# EAGLE board ece411-t10-plant-final-layout (EAGLE 9.2.1)
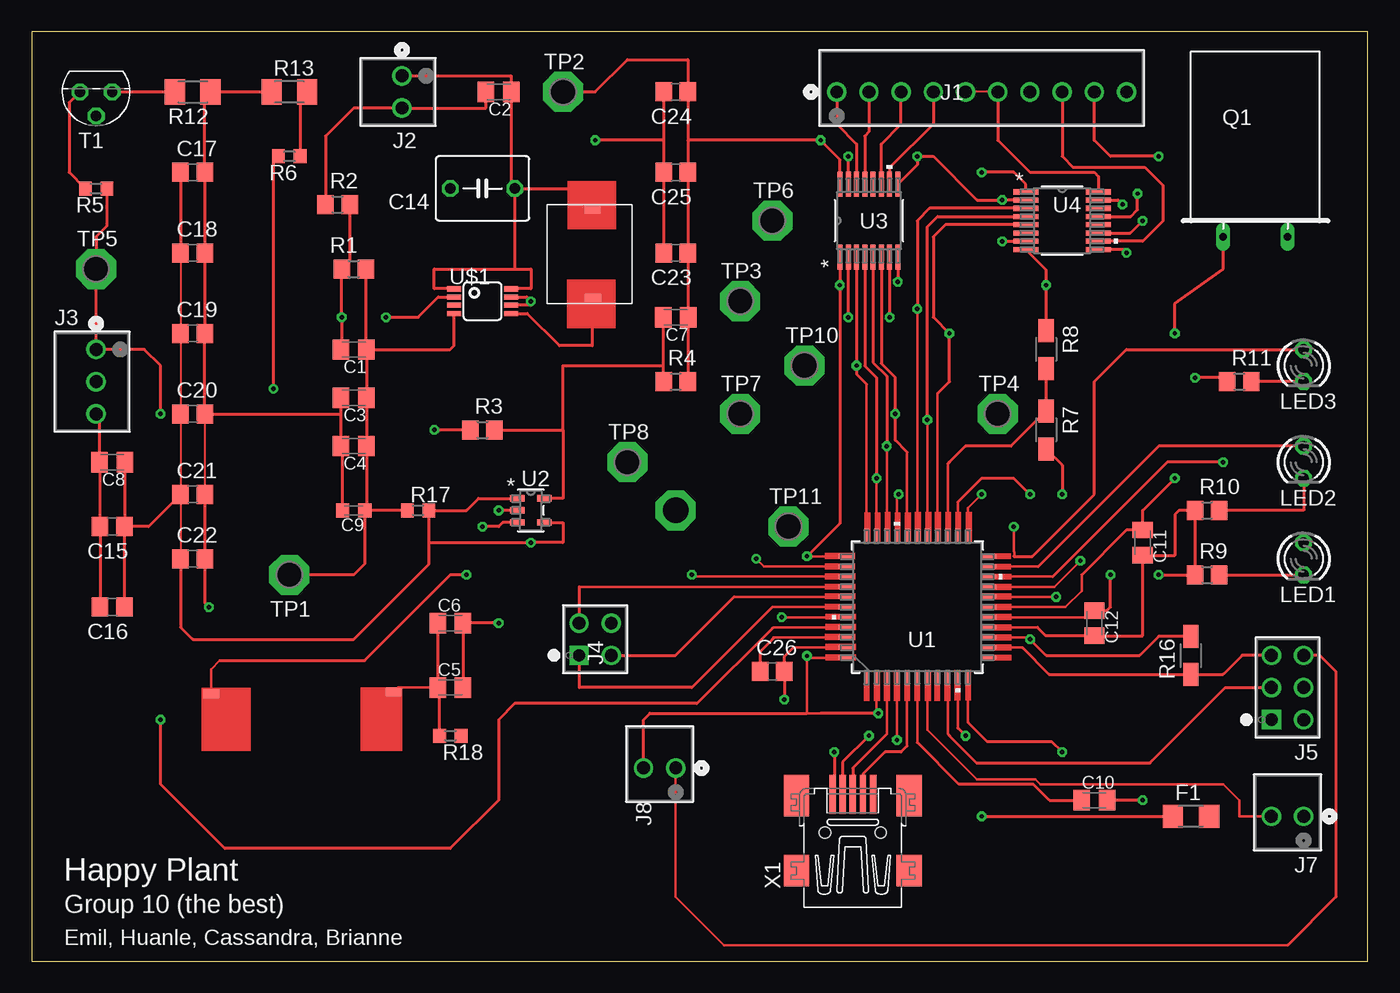
[diagram p0: board, top side]
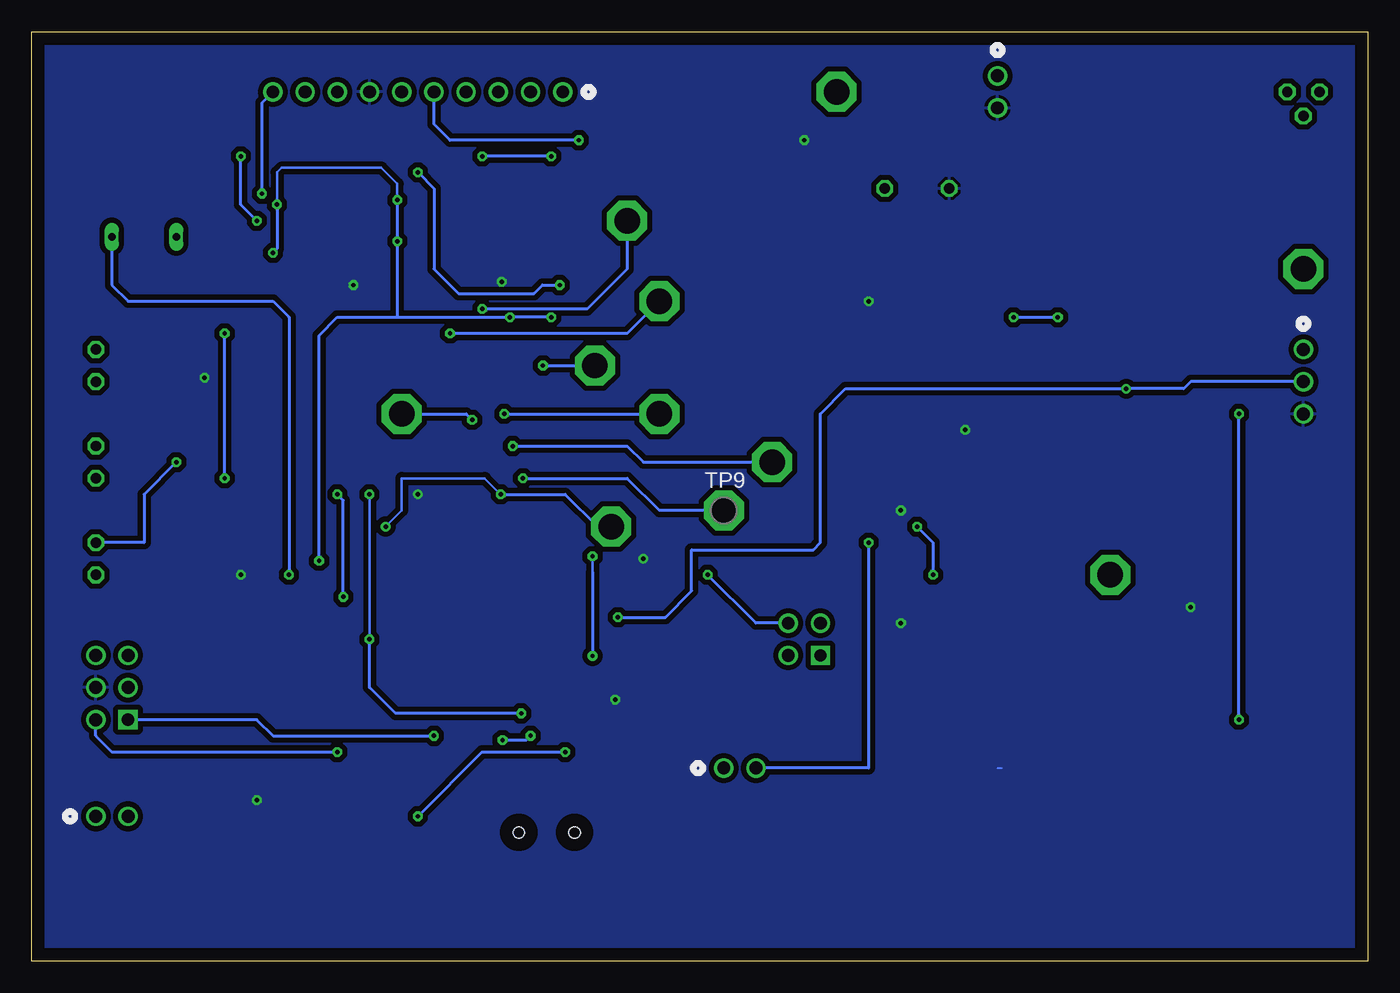
[diagram p1: board, bottom side, seen from below]

Size 105.39 x 73.33 mm. Coordinates in mm from the lower left corner, seen from the top.
Outline: 0,0 105.39,0 105.39,73.33 0,73.33 0,0
Copper layers (1*16): Top 0.035mm / dielectric 1.5mm / Bottom 0.035mm
Design rules "default": minimum track width 6mil, minimum drill 0.35mm, track to track 6mil, track to pad 6mil, pad to pad 6mil, via to via 6mil, smd to smd 6mil, copper to edge 40mil, drill to drill 6mil, minimum pad ring 10mil, minimum via ring 8mil, stop-mask expansion 4mil, vias tented up to drill 0mil, thermal gap 10mil

## Footprints (pad centres in the part's own frame; a part is rotated, then mirrored left to right if it is on the bottom)
C0805K = smd 1.3 x 1.6: 1 -1,0; 2 1,0
C0603K = smd 1.05 x 1.08: 1 -0.875,0; 2 0.875,0
C050-050X075 = drill 0.813 octagon: 1 -2.54,0; 2 2.54,0
C0805 = smd 1.3 x 1.5: 1 -0.95,0; 2 0.95,0
R1206 = smd 1.6 x 1.803: 1 -1.422,0; 2 1.422,0
1-640456-0 = drill 1.016 pad 1.524: 1 -22.86,0; 2 -20.32,0; 3 -17.78,0; 4 -15.24,0; 5 -12.7,0; 6 -10.16,0; 7 -7.62,0; 8 -5.08,0; 9 -2.54,0; 10 0,0
CONN2_640456-2 = drill 1.016 pad 1.524: 1 2.54,0; 2 0,0
CONN3_640456-3 = drill 1.016 pad 1.524: 1 5.08,0; 2 2.54,0; 3 0,0
67996-104HLF = drill 0.965 pad 1.524 square: 1 -2.54,2.54 | drill 1.016 pad 1.524: 2 -2.54,0; 3 0,2.54; 4 0,0
67996-406HLF = drill 0.965 pad 1.524 square: 1 -5.08,2.54 | drill 1.016 pad 1.524: 2 -5.08,0; 3 -2.54,2.54; 4 -2.54,0; 5 0,2.54; 6 0,0
MPLC0730L4R7 = smd 0.635 x 1.27: 1 0.4,3.6; 2 7.398,3.625
LED3MM = drill 0.813 octagon: A -1.27,0; K 1.27,0
Q = drill 0.61 long: 1 -2.54,-7.62; 2 2.54,-7.62
R0805 = smd 1.3 x 1.5: 1 -0.95,0; 2 0.95,0
R0603 = smd 1 x 1.1: 1 -0.85,0; 2 0.85,0
R1206W = smd 1.8 x 1.2: 1 -1.499,0; 2 1.499,0
M1206 = smd 1.6 x 2: 1 -1.4,0; 2 1.4,0
TO92 = drill 0.813 octagon: 1 1.27,0; 2 0,1.905; 3 -1.27,0
P1-20 = drill 2.007 pad 3.15 octagon: TP 0,0
44ML-L = smd 1.168 x 0.356: 1 -5.613,4; 2 -5.613,3.2; 3 -5.613,2.4; 4 -5.613,1.6; 5 -5.613,0.8; 6 -5.613,0; 7 -5.613,-0.8; 8 -5.613,-1.6; 9 -5.613,-2.4; 10 -5.613,-3.2; 11 -5.613,-4; 23 5.613,-4; 24 5.613,-3.2; 25 5.613,-2.4; 26 5.613,-1.6; 27 5.613,-0.8; 28 5.613,0; 29 5.613,0.8; 30 5.613,1.6; 31 5.613,2.4; 32 5.613,3.2; 33 5.613,4 | smd 0.356 x 1.168: 12 -4,-5.613; 13 -3.2,-5.613; 14 -2.4,-5.613; 15 -1.6,-5.613; 16 -0.8,-5.613; 17 0,-5.613; 18 0.8,-5.613; 19 1.6,-5.613; 20 2.4,-5.613; 21 3.2,-5.613; 22 4,-5.613; 34 4,5.613; 35 3.2,5.613; 36 2.4,5.613; 37 1.6,5.613; 38 0.8,5.613; 39 0,5.613; 40 -0.8,5.613; 41 -1.6,5.613; 42 -2.4,5.613; 43 -3.2,5.613; 44 -4,5.613
DBV5-L = smd 1.168 x 0.508: 1 -1.067,0.95; 2 -1.067,0; 3 -1.067,-0.95; 4 1.067,-0.95; 5 1.067,0.95
PW16-M = smd 1.981 x 0.406: 1 -2.87,2.275; 2 -2.87,1.625; 3 -2.87,0.975; 4 -2.87,0.325; 5 -2.87,-0.325; 6 -2.87,-0.975; 7 -2.87,-1.625; 8 -2.87,-2.275; 9 2.87,-2.275; 10 2.87,-1.625; 11 2.87,-0.975; 12 2.87,-0.325; 13 2.87,0.325; 14 2.87,0.975; 15 2.87,1.625; 16 2.87,2.275
MSOP8 = smd 0.4 x 1.1: 1 -0.975,-2.25; 2 -0.325,-2.25; 3 0.325,-2.25; 4 0.975,-2.25; 5 0.975,2.25; 6 0.325,2.25; 7 -0.325,2.25; 8 -0.975,2.25
PA4346.103ANLT = smd 1.27 x 0.635: P$1 0.635,0.33; P$2 15.062,0.483
32005-201 = smd 3.1 x 0.5: 1 3,1.6; 2 3,0.8; 3 3,0; 4 3,-0.8; 5 3,-1.6 | smd 2.5 x 2: M1 -3,-4.45; M2 -3,4.45 | smd 3.3 x 2: M3 2.9,4.45; M4 2.9,-4.45 | hole 0.9: 0,2.2; 0,-2.2

## Placement (x,y rotation side)
C1  27p  [C0805K]  25.4,48.26 180 top
C2  10u  [C0805K]  36.83,68.58 180 top
C3  10u  [C0805K]  25.4,44.45 180 top
C4  10u  [C0805K]  25.4,40.64 180 top
C5  10u  [C0805K]  33.02,21.59 0 top
C6  10u  [C0805K]  33.02,26.67 0 top
C7  n/s  [C0805K]  50.8,50.8 180 top
C8  10u  [C0805K]  6.35,39.37 180 top
C9  NS  [C0603K]  25.4,35.56 180 top
C10  1uF  [C0805K]  83.82,12.7 0 top
C11  18pF  [C0805K]  87.63,33.02 270 top
C12  18pF  [C0805K]  83.82,26.67 270 top
C14  1000uF  [C050-050X075]  35.56,60.96 180 top
C15  0.1uF  [C0805]  6.35,34.29 180 top
C16  0.1uF  [C0805]  6.35,27.94 180 top
C17  0.1uF  [C0805]  12.7,62.23 0 top
C18  0.1uF  [C0805]  12.7,55.88 0 top
C19  0.1uF  [C0805]  12.7,49.53 0 top
C20  0.1uF  [C0805]  12.7,43.18 0 top
C21  0.1uF  [C0805]  12.7,36.83 0 top
C22  0.1uF  [C0805]  12.7,31.75 0 top
C23  0.1uF  [C0805]  50.8,55.88 180 top
C24  0.1uF  [C0805]  50.8,68.58 180 top
C25  0.1uF  [C0805]  50.8,62.23 180 top
C26  0.1uF  [C0805]  58.42,22.86 0 top
F1  500mA  [R1206]  91.44,11.43 0 top
J1  1-640456-0  [1-640456-0]  86.36,68.58 0 top
J2  640456-2  [CONN2_640456-2]  29.21,67.31 90 top
J3  640456-3  [CONN3_640456-3]  5.08,43.18 90 top
J4  67996-104HLF  [67996-104HLF]  45.72,26.67 90 top
J5  67996-406HLF  [67996-406HLF]  100.33,24.13 90 top
J7  640456-2  [CONN2_640456-2]  97.79,11.43 0 top
J8  640456-2  [CONN2_640456-2]  48.26,15.24 0 top
L1  MPLC0730L4R7  [MPLC0730L4R7]  40.64,59.69 270 top
LED1  [LED3MM]  100.33,31.75 270 top
LED2  [LED3MM]  100.33,39.37 270 top
LED3  [LED3MM]  100.33,46.99 270 top
Q1  16MHz  [Q]  96.52,64.77 0 top
R1  976k  [R0805]  25.4,54.61 0 top
R2  309k  [R0805]  24.13,59.69 0 top
R3  20k  [R0805]  35.56,41.91 0 top
R4  61.9k  [R0805]  50.8,45.72 0 top
R5  0  [R0603]  5.08,60.96 0 top
R6  0  [R0603]  20.32,63.5 180 top
R7  [R1206W]  80.01,41.91 270 top
R8  4.99k  [R1206W]  80.01,48.26 270 top
R9  1.00k  [R0805]  92.71,30.48 0 top
R10  1.00k  [R0805]  92.71,35.56 0 top
R11  1.00k  [R0805]  95.25,45.72 0 top
R12  10k  [M1206]  12.7,68.58 180 top
R13  100  [M1206]  20.32,68.58 0 top
R16  4.99k  [R1206W]  91.44,24.13 90 top
R17  0  [R0603]  30.48,35.56 0 top
R18  0  [R0603]  33.02,17.78 0 top
T1  2N3904  [TO92]  5.08,68.58 180 top
TP1  TPPAD1-20  [P1-20]  20.32,30.48 0 top
TP2  TPPAD1-20  [P1-20]  41.91,68.58 0 top
TP3  TPPAD1-20  [P1-20]  55.88,52.07 0 top
TP4  TPPAD1-20  [P1-20]  76.2,43.18 0 top
TP5  TPPAD1-20  [P1-20]  5.08,54.61 0 top
TP6  TPPAD1-20  [P1-20]  58.42,58.42 0 top
TP7  TPPAD1-20  [P1-20]  55.88,43.18 0 top
TP8  TPPAD1-20  [P1-20]  46.99,39.37 0 top
TP9  TPPAD1-20  [P1-20]  50.8,35.56 0 bottom
TP10  TPPAD1-20  [P1-20]  60.96,46.99 0 top
TP11  TPPAD1-20  [P1-20]  59.69,34.29 0 top
U1  ATMEGA32U4-AUR44ML-L  [44ML-L]  69.85,27.94 90 top
U2  TPS560200DBVRDBV5-L  [DBV5-L]  39.37,35.56 0 top
U3  CD40109BPWRPW16-M  [PW16-M]  66.04,58.42 90 top
U4  CD40109BPWRPW16-M  [PW16-M]  81.28,58.42 0 top
U$1  MCP1642B/D8-MSOP  [MSOP8]  35.56,52.07 270 top
U$2  ETQ-P5M100YFKMPLC2  [PA4346.103ANLT]  29.21,21.59 180 top
X1  MINI-USB-32005-201  [32005-201]  64.77,10.16 90 top

## Library data of the parts
C1 = rcl; COST: 0.16; DESCRIPTION: Ceramic FB Cap; DISTRIBUTER: Arrow; DIST_PART_NUMBER: C0805C270J1GACTU; MANUFACTURER: KEMET; MFG_PART_NUMBER: C0805C270J1GACTU; PACKAGE: 0805; PART_NUMBER: C0805C270J1GACTU; SPICEPREFIX: C; TOL: +-10%; VOLTAGE: 50V
C2-C6 C8 = rcl; COST: 0.27; DESCRIPTION: Ceramic Output Capacitor; DISTRIBUTER: Arrow; DIST_PART_NUMBER: GRM21BR61D106ME15L; MANUFACTURER: Murata; MFG_PART_NUMBER: GRM21BR61D106ME15L; PACKAGE: 0805; PART_NUMBER: GRM21BR61D106ME15L; SPICEPREFIX: C; TOL: +-10%; VOLTAGE: 10V
C7 C9 = rcl; SPICEPREFIX: C
C10 = rcl; COST: 0.2; DESCRIPTION: Bypass Capacitor; DISTRIBUTER: Arrow; DIST_PART_NUMBER: LMK212BJ105KD-T; MANUFACTURER: Taiyo Yuden; MFG_PART_NUMBER: LMK212BJ105KD-T; PACKAGE: 0805; PART_NUMBER: LMK212BJ105KD-T; SPICEPREFIX: C
C11 C12 = rcl; COST: 0.31; DESCRIPTION: Crystal Capacitor; DISTRIBUTER: Arrow; DIST_PART_NUMBER: GRM21A5C2E180JW01D; MANUFACTURER: Murata; MFG_PART_NUMBER: GRM21A5C2E180JW01D; PACKAGE: 0805; PART_NUMBER: GRM21A5C2E180JW01D; SPICEPREFIX: C
C14 = rcl; COST: 0.36; DESCRIPTION: Input Cap; DISTRIBUTER: Arrow; DIST_PART_NUMBER: EEU-FS1A102B; MANUFACTURER: Panasonic; MFG_PART_NUMBER: EEU-FS1A102B; PACKAGE: Radial; PART_NUMBER: EEU-FS1A102B; SPICEPREFIX: C; TOL: +-10%; VOLTAGE: 16V
C15-C26 = rcl; COST: 0.35; DESCRIPTION: Power Supply Caps; DISTRIBUTER: Arrow; DIST_PART_NUMBER: C0805C104K6RACTU; MANUFACTURER: KEMET; MFG_PART_NUMBER: C0805C104K6RACTU; PACKAGE: 0805; PART_NUMBER: C0805C104K6RACTU; SPICEPREFIX: C
F1 = ECE411; COST: 0.82; DESCRIPTION: 500mA Fuse; DISTRIBUTER: Arrow; DIST_PART_NUMBER: CC12H500MA-TR; MANUFACTURER: Eaton; MFG_PART_NUMBER: CC12H500MA-TR; PACKAGE: 1206; PART_NUMBER: CC12H500MA-TR
J1 = ECE411; COST: 0.27; DESCRIPTION: Display Connector; DISTRIBUTER: Arrow; DIST_PART_NUMBER: 1-640456-0; MANUFACTURER: TE; MANUFACTURER_PART_NUMBER: 16404560; MFG_PART_NUMBER: 1-640456-0; PACKAGE: 10 POS 2.54mm; PART_NUMBER: 1-640456-0; VENDOR: TE Connectivity
J2 = ECE411; COMMENT: Power Connector; COST: 0.1; DESCRIPTION: 2 Pin Header; DISTRIBUTER: Arrow; DIST_PART_NUMBER: 640456-2; MANUFACTURER: TE; MANUFACTURER_PART_NUMBER: 6404562; MFG_PART_NUMBER: 640456-2; PACKAGE: HDR 2 POS 2.54mm; PART_NUMBER: 640456-2; VENDOR: TE Connectivity
J3 = ECE411; COST: 0.11; DESCRIPTION: Soil Sensor Connector; DISTRIBUTER: Arrow; DIST_PART_NUMBER: 640456-3; MANUFACTURER: TE-Connectivity; MANUFACTURER_PART_NUMBER: 6404563; MFG_PART_NUMBER: 640456-3; NOTE: Soil Sensor Connector; PACKAGE: HDR 3 POS 2.54mm; PART_NUMBER: 640456-3; VENDOR: TE Connectivity
J4 = ECE411; COST: 0.21; DESCRIPTION: Jtag Header; DISTRIBUTER: Arrow; DIST_PART_NUMBER: 67996-404HLF; MANUFACTURER: Amphenol; MANUFACTURER_PART_NUMBER: 67996104HLF; MFG_PART_NUMBER: 67996-404HLF; PACKAGE: HDR 4 POS 2.54mm; PART_NUMBER: 67996-404HLF; VENDOR: Amphenol FCI
J5 = ECE411; COST: 0.3; DESCRIPTION: Serial Connector; DISTRIBUTER: Arrow; DIST_PART_NUMBER: 67996-406HLF; MANUFACTURER: Amphenol; MANUFACTURER_PART_NUMBER: 67996406HLF; MFG_PART_NUMBER: 67996-406HLF; PACKAGE: HDR 6 POS 2.54mm; PART_NUMBER: 67996-406HLF; VENDOR: Amphenol FCI
J7 = ECE411; COMMENT: Jumper; COST: 0.1; DESCRIPTION: Jumper; DISTRIBUTER: Arrow; DIST_PART_NUMBER: 640456-2; MANUFACTURER: TE; MANUFACTURER_PART_NUMBER: 6404562; MFG_PART_NUMBER: 640456-2; PACKAGE: HDR 2 POS 2.54mm; PART_NUMBER: 640456-2; VENDOR: TE Connectivity
J8 = ECE411; COMMENT: Jumper; COST: 0.1; DESCRIPTION: 2 Pin Header; DISTRIBUTER: Arrow; DIST_PART_NUMBER: 640456-2; MANUFACTURER: TE; MANUFACTURER_PART_NUMBER: 6404562; MFG_PART_NUMBER: 640456-2; PACKAGE: HDR 2 POS 2.54mm; PART_NUMBER: 640456-2; VENDOR: TE Connectivity
L1 = ECE411; COST: 1.11; DESCRIPTION: Boost Inductor; DISTRIBUTER: Arrow; DIST_PART_NUMBER: NPIM74C4R7MTRF; MANUFACTURER: NIC Componenets; MFG_PART_NUMBER: NPIM74C4R7MTRF; PACKAGE: Shielded; PART_NUMBER: NPIM74C4R7MTRF; VALUES: 4.7uH
LED1-LED3 = led; COST: 0.33; DESCRIPTION: LED Indicator; DISTRIBUTER: Arrow; DIST_PART_NUMBER: WP7113SRD/J4; MANUFACTURER: Kingbright; MFG_PART_NUMBER: WP7113SRD/J4; PACKAGE: 2-Pin T-1 3/4; PART_NUMBER: WP7113SRD/J4
Q1 = special; COST: 0.28; DESCRIPTION: Crystal Oscilator; DISTRIBUTER: Arrow; DIST_PART_NUMBER: FC4STCBAF16.0-BAG200; MANUFACTURER: Fox Electronics; MFG_PART_NUMBER: FC4STCBAF16.0-BAG200; PACKAGE: Thru-Hole Crystal; PART_NUMBER: FC4STCBAF16.0-BAG200
R1 = rcl; COST: 0.32; DESCRIPTION: Feedback Resistor 1; DISTRIBUTER: Arrow; DIST_PART_NUMBER: ERA-6AEB9763V; MANUFACTURER: Panasonic; MFG_PART_NUMBER: ERA-6AEB9763V; PACKAGE: 0805; PART_NUMBER: ERA-6AEB9763V; SPICEPREFIX: R
R2 = rcl; COST: 0.32; DESCRIPTION: Feedback Resistor 2; DISTRIBUTER: Arrow; DIST_PART_NUMBER: ERA-6AEB3093V; MANUFACTURER: Panasonic; MFG_PART_NUMBER: ERA-6AEB3093V; PACKAGE: 0805; PART_NUMBER: ERA-6AEB3093V; SPICEPREFIX: R
R3 = rcl; COST: 0.332; DESCRIPTION: Buck Feedback Res 2; DISTRIBUTER: Arrow; DIST_PART_NUMBER: ERA6AEB203V; MANUFACTURER: Panasonic; MFG_PART_NUMBER: ERA6AEB203V; PACKAGE: 0805; PART_NUMBER: ERA6AEB203V; SPICEPREFIX: R
R4 = rcl; COST: 0.09; DESCRIPTION: Buck Feedback Res 1; DISTRIBUTER: Arrow; DIST_PART_NUMBER: RC2012F6192CS; MANUFACTURER: Samsung; MFG_PART_NUMBER: RC2012F6192CS; PACKAGE: 0805; PART_NUMBER: RC2012F6192CS; SPICEPREFIX: R
R5 R6 R17 R18 = rcl; COST: 0.09; DESCRIPTION: 0 Ohm Jumpers; DISTRIBUTER: Arrow; DIST_PART_NUMBER: CRCW08050000Z0EBC; MANUFACTURER: Vishay; MFG_PART_NUMBER: CRCW08050000Z0EBC; PACKAGE: 0805; PART_NUMBER: CRCW08050000Z0EBC; SPICEPREFIX: R
R7 = rcl; COST: 1.66; DESCRIPTION: Light Sensor; DISTRIBUTER: Digi-key; DIST_PART_NUMBER: 516-1718-1-ND; MANUFACTURER: Broadcom Limited; MFG_PART_NUMBER: APDS-9006-020; PACKAGE: 1206; PARTNUMBER: APDS-9006-020; PART_NUMBER: APDS-9006-020; SPICEPREFIX: R
R8 R16 = rcl; COST: 0.52; DESCRIPTION: Light Sensor Resistor; DISTRIBUTER: Arrow; DIST_PART_NUMBER: ERJ-PB6B4991V; MANUFACTURER: Panasonic; MFG_PART_NUMBER: ERJ-PB6B4991V; PACKAGE: 0805; PART_NUMBER: ERJ-PB6B4991V; SPICEPREFIX: R
R9-R11 = rcl; COST: 0.09; DESCRIPTION: RC Filter Resistance; DISTRIBUTER: Arrow; DIST_PART_NUMBER: CRGH0805J1K0; MANUFACTURER: TE Connectivity; MFG_PART_NUMBER: CRGH0805J1K0; PACKAGE: 0805; PART_NUMBER: CRGH0805J1K0; SPICEPREFIX: R
R12 = rcl; COST: 0.09; DESCRIPTION: Soil Sensor Resistor 2; DISTRIBUTER: Arrow; DIST_PART_NUMBER: CRGH0805J10K; MANUFACTURER: Vishay; MFG_PART_NUMBER: CRGH0805J10K; PACKAGE: 0805; PART_NUMBER: CRGH0805J10K; SPICEPREFIX: R
R13 = rcl; COST: 0.09; DESCRIPTION: Soil Sensor Resistor; DISTRIBUTER: Arrow; DIST_PART_NUMBER: CRCW0805100RFKEAC; MANUFACTURER: Vishay; MFG_PART_NUMBER: CRCW0805100RFKEAC; PACKAGE: 0805; PART_NUMBER: CRCW0805100RFKEAC; SPICEPREFIX: R
T1 = transistor; COST: 0.25; DESCRIPTION: Soil Sensor Transistor; DISTRIBUTER: Arrow; DIST_PART_NUMBER: 2N3904TF; MANUFACTURER: ON Semiconductor; MFG_PART_NUMBER: 2N3904TF; PACKAGE: TO-92; PART_NUMBER: 2N3904RLRPG
TP1-TP11 = testpad
U1 = ECE411; MANUFACTURER_PART_NUMBER: ATMEGA32U4AUR; VENDOR: Atmel
U2 = ECE411; MANUFACTURER_PART_NUMBER: TPS560200DBVR; NOTE: 3.3V converter; VENDOR: Texas Instruments
U3 U4 = ECE411; COST: 0.29; DESCRIPTION: Level Shift; DISTRIBUTER: Arrow; DIST_PART_NUMBER: CD40109BPW; MANUFACTURER: TE; MANUFACTURER_PART_NUMBER: CD40109BPWR; MFG_PART_NUMBER: CD40109BPW; PACKAGE: 16-Pin SOP; PART_NUMBER: CD40109BPW; VENDOR: Vendor
U$1 = ECE411; COST: 0.91; DESCRIPTION: 5V Power Converter; DISTRIBUTER: Arrow; DIST_PART_NUMBER: MCP1642B-50I/MS; MANUFACTURER: Microchip; MFG_PART_NUMBER: MCP1642B-50I/MS; PACKAGE: 8-Pin MSOP; PART_NUMBER: MCP1642B-50I/MS
U$2 = ECE411
X1 = con-cypressindustries; COST: 0.67; DESCRIPTION: USB Connector; DISTRIBUTER: Arrow; DIST_PART_NUMBER: UJ2-MABH-2-SMT-TR; MANUFACTURER: CUI Inc; MFG_PART_NUMBER: UJ2-MABH-2-SMT-TR; OC_FARNELL: unknown; OC_NEWARK: unknown; PACKAGE: 5 POS 0.8mm Solder; PART_NUMBER: UJ2-MABH-2-SMT-TR

## Nets
5V_OUT: J7.1
+3.3V: C7.1 C23.1 C24.1 C25.1 J1.5 J1.6 R4.2 TP2.TP U3.16 U4.16
AREF: C26.1 U1.42
DISP_1: TP10.TP U1.33 U3.3
DISP_2: TP9.TP U1.32 U3.4
DISP_3: TP8.TP U1.31 U3.5
DISP_5: TP6.TP U1.28 U4.3
DISP_6: TP4.TP U1.27 U4.4
DISP_7: TP3.TP U1.26 U4.5
DIY_SENSOR: T1.2
GND: C2.2 C3.2 C4.2 C5.2 C6.2 C8.2 C9.2 C10.2 C11.2 C12.2 C14.2 C15.2 C16.2 C17.2 C18.2 C19.2 C20.2 C21.2 C22.2 C23.2 C24.2 C25.2 C26.2 J1.7 J2.2 J3.3 J5.4 R2.1 R3.1 R8.1 R9.1 R10.1 R11.1 R12.1 R13.1 U1.15 U1.23 U1.35 U1.43 U2.2 U3.8 U4.8 U$1.6 U$1.7
LIGHT_SENSE_IN: R7.1 R8.2 U1.25
LIGHT_SENSE_PWR: R7.2 U1.18
LVL_SHFT_EN: U1.19 U3.2 U3.7 U3.9 U3.15 U4.2 U4.7 U4.9 U4.15
N$1: U2.3 U$2.P$2
N$2: L1.2 U$1.5
N$3: C7.2 R3.2 R4.1 U2.5
N$4: U1.5 X1.4
N$5: C12.1 Q1.2 U1.16
N$7: TP7.TP U1.29 U3.6
N$8: C11.1 Q1.1 U1.17
N$9: U1.4 X1.2
N$10: U1.3 X1.3
N$11: F1.1 X1.1
N$12: LED3.K R11.2
N$13: C1.1 C3.1 C4.1 C9.1 R1.2 R17.1 TP1.TP U$1.4
N$14: J1.8 U4.10
N$15: J1.9 U4.11
N$16: C10.1 U1.6
N$17: J1.1 U3.14
N$18: LED2.K R10.2
N$19: J5.6 J8.1
N$20: LED1.K R9.2
N$21: R5.1 T1.1
N$22: R12.2 T1.3
N$23: LED1.A U1.20
N$24: LED2.A U1.21
N$25: LED3.A TP11.TP U1.30
N$26: R6.1 R13.2
N$27: J1.2 U3.13
N$28: J1.3 U3.11
N$29: J1.4 U3.10
N$30: J1.10 U4.13
N$31: R18.2
N$32: C5.1 C6.1 R18.1 U$2.P$1
N$33: U1.22
PDI: J5.1 U1.10
PDO: J5.2 U1.11
RST: J5.5 R16.1 U1.13
SCLK: J5.3 U1.9
SENSOR_PWR: J3.2 R6.2 U1.40
SOIL_SENSOR: J3.1 R5.2 TP5.TP U1.41
SOUND_EN: U1.12
SWITCH: C2.1 C14.1 J2.1 L1.1 U$1.1 U$1.8
TCK: J4.1 U1.39
TDI: J4.4 U1.36
TDO: J4.3 U1.37
TMS: J4.2 U1.38
VBUS: J7.2 U1.7
VCC: C8.1 C15.1 C16.1 C17.1 C18.1 C19.1 C20.1 C21.1 C22.1 J8.2 R16.2 R17.2 U1.2 U1.14 U1.24 U1.34 U1.44 U2.1 U2.4 U3.1 U4.1
VFB: C1.2 R1.1 R2.2 U$1.2

## Tracks (layer width: path | path; a pad name or v marks a point on that pad's centre or on a via)
+3.3V  (via drill 0.35)
  Top 0.152: J1.6 J1.5
  Top 0.254: 51.75,64.77 C24.1 51.75,71.12 46.99,71.12 44.45,68.58 TP2.TP | 51.75,64.77 C25.1 C23.1 51.75,50.85 C7.1 51.75,50.75 R4.2 51.75,45.77 | U3.16 63.77,63.21 63.75,63.23 63.75,63.25 v62.23,64.77 51.75,64.77 | J1.6 76.2,64.77 78.74,62.23 83.82,62.23 84.15,61.9 U4.16
  Bottom 0.254: v62.23,64.77 72.39,64.77 73.66,66.04 J1.5
AREF
  Top 0.203: U1.42 58.56,25.54
  Top 0.254: C26.1 57.47,24.45 58.42,25.4 58.56,25.54
DISP_1  (via drill 0.35)
  Top 0.203: U1.33 65.85,45.53
  Top 0.254: U3.3 v65.06,46.99 | v65.06,46.99 65.06,46.31 65.85,45.53 | v65.06,46.99
  Bottom 0.254: v65.06,46.99 TP10.TP
DISP_2  (via drill 0.35)
  Top 0.203: U1.32 v66.65,38.1
  Top 0.254: U3.4 65.71,46.96 66.65,46.03 v66.65,38.1
  Bottom 0.254: v66.65,38.1 58.42,38.1 55.88,35.56 TP9.TP
DISP_3  (via drill 0.35)
  Top 0.203: U1.31 v67.45,40.64
  Top 0.254: U3.5 66.36,47.24 67.45,46.16 v67.45,40.64
  Bottom 0.254: v67.45,40.64 58.42,40.64 57.15,39.37 TP8.TP
DISP_5  (via drill 0.35)
  Top 0.203: U1.28 v69.85,51.46
  Top 0.254: U4.3 70.82,59.39 69.85,58.42 v69.85,51.46
  Bottom 0.254: TP6.TP 58.42,54.61 61.57,51.46 v69.85,51.46
DISP_6  (via drill 0.35)
  Top 0.203: U1.27 v70.65,42.71
  Top 0.254: v70.65,42.71 70.65,57.95 71.44,58.75 U4.4
  Bottom 0.254: TP4.TP 71.12,43.18 v70.65,42.71
DISP_7  (via drill 0.35)
  Top 0.203: U1.26 71.45,44.78
  Top 0.254: U4.5 72.06,58.09 71.12,57.15 71.12,50.8 v72.39,49.53 72.39,45.72 71.45,44.78
  Bottom 0.254: TP3.TP 58.42,49.53 v72.39,49.53
GND  (via drill 0.35)
  Top 0.152: C20.2 C21.2 | R9.1 91.44,30.8
  Top 0.203: U1.15 79.34,26.34 | v57.15,31.75 57.76,31.14 U1.35 | U1.43 60.07,24.74 | U1.23 73.85,35.75 v74.93,36.83
  Top 0.254: C21.2 C22.2 13.65,28.26 v13.97,27.94 | C19.2 C20.2 24.4,43.18 | C19.2 13.97,49.85 | C5.2 C6.2 v36.83,26.67 | C19.2 C18.2 C17.2 13.65,68.13 R12.1 R13.1 | C9.2 24.53,40.52 C4.2 24.4,43.18 | 24.4,43.18 C3.2 | R2.1 23.18,65.09 25.4,67.31 J2.2 35.83,67.31 C2.2 | U2.2 v36.83,35.56 | U$1.6 39.37,51.75 v39.37,52.07 39.05,52.39 U$1.7 | 79.34,26.34 80.01,25.67 C12.2 87.63,25.67 C11.2 90.17,32.02 90.17,35.24 90.49,35.56 R10.1 R9.1 v88.9,30.48 | C16.2 C15.2 5.35,34.34 C8.2 5.35,43.18 J3.3 | U3.8 v68.31,53.61 v68.32,53.61 | C23.2 C25.2 49.85,64.77 | C24.2 49.85,64.77 | 49.85,64.77 v44.45,64.77 | v87.63,12.7 C10.2 | R11.1 93.98,46.04 v91.76,46.04 | R3.1 v31.75,41.91 | 60.07,24.74 59.37,24.04 C26.2 v59.37,20.64 | U4.8 80.01,54.55 v80.01,53.34 R8.1
  Bottom 0.152: 29.21,15.24 28.89,15.24
  pour Bottom (isolate 0.406): 0,73.66 0,0 105.41,0 105.41,73.66
LIGHT_SENSE_IN
  Top 0.203: U1.25 72.25,39.23
  Top 0.254: R8.2 R7.1 77.24,40.64 73.66,40.64 72.39,39.37 72.25,39.23
LIGHT_SENSE_PWR  (via drill 0.35)
  Top 0.203: U1.18 v80.81,28.74
  Top 0.254: R7.2 81.28,39.14 v81.28,36.83
  Bottom 0.254: v80.81,28.74 80.81,36.36 v81.28,36.83
LVL_SHFT_EN  (via drill 0.35)
  Top 0.203: U1.19 80.67,29.54 v82.72,31.58
  Top 0.254: U3.15 v64.41,63.49 v64.41,63.5 | U3.9 69.85,62.83 v69.85,63.5 71.12,63.5 74.57,60.05 v76.55,60.05 U4.2 | U3.7 v67.66,50.81 v67.67,50.8 | v64.41,50.8 U3.2 | U4.15 85.68,60.05 v86.03,59.69 | v86.36,55.88 86.09,56.14 U4.9 | v76.55,56.8 U4.7
  Bottom 0.203: v76.55,60.05 76.55,61.32 77.82,62.59 85.67,62.59 86.03,62.23 v86.03,59.69
  Bottom 0.254: v64.41,63.5 v69.85,63.5 | v86.03,59.69 86.03,56.21 v86.36,55.88 | 76.55,50.8 v67.67,50.8 v64.41,50.8 | v76.55,60.05 v76.55,56.8 | v76.55,56.8 | v76.55,56.8 76.55,50.8 | v82.72,31.58 82.72,49.36 81.28,50.8 76.55,50.8
N$1  (via drill 0.35)
  Top 0.203: 14.83,23.72 14.15,23.04 U$2.P$2
  Top 0.254: U2.3 37.15,34.61 36.83,34.29 v35.56,34.29 | v34.29,30.48 33.02,30.48 26.26,23.72 14.83,23.72
  Bottom 0.254: v35.56,34.29 34.29,33.02 v34.29,30.48
N$2
  Top 0.254: L1.2 44.23,48.55 41.62,48.55 39.08,51.09 U$1.5
N$3
  Top 0.254: R3.2 41.91,41.91 | U2.5 41.91,36.51 41.91,41.91 | C7.2 49.8,46.99 | 49.8,46.99 49.8,45.72 R4.1 | 41.91,41.91 41.91,46.99 49.8,46.99
N$4
  Top 0.203: U1.5 69.05,16.98
  Top 0.254: X1.4 65.57,14.77 67.31,16.51 68.58,16.51 69.05,16.98
N$5  (via drill 0.35)
  Top 0.203: U1.16 83.29,27.14
  Top 0.254: 83.29,27.14 C12.1 84.82,27.67 85.09,27.94 v85.09,30.48
  Bottom 0.254: Q1.2 99.06,53.34 97.79,52.07 86.36,52.07 85.09,50.8 v85.09,30.48
N$7  (via drill 0.35)
  Top 0.203: U1.29 69.05,40.17
  Top 0.254: U3.6 67.02,47.16 68.12,46.06 v68.12,43.18 68.12,41.1 69.05,40.17
  Bottom 0.254: v68.12,43.18 TP7.TP
N$8  (via drill 0.35)
  Top 0.203: U1.17 81.55,27.94 82.82,29.21 82.82,30.48
  Top 0.254: 82.82,30.48 86.36,34.02 C11.1 87.63,35.56 v90.17,38.1 | Q1.1 93.98,54.61 90.17,51.89 v90.17,49.53
  Bottom 0.254: v90.17,38.1 v90.17,49.53
N$9  (via drill 0.35)
  Top 0.203: U1.4 v68.25,17.45
  Top 0.254: v66.04,17.78 63.97,15.71 X1.2
  Bottom 0.254: v68.25,17.45 66.37,17.45 v66.04,17.78
N$10
  Top 0.203: U1.3 67.45,17.92
  Top 0.254: X1.3 64.77,15.24 67.31,17.78 67.45,17.92
N$11  (via drill 0.35)
  Top 0.254: v74.93,11.43 F1.1 | v63.31,16.51 63.31,13.3 X1.1
  Bottom 0.254: v74.93,11.43 69.85,16.51 v63.31,16.51
N$12
  Top 0.254: LED3.K R11.2
N$13
  Top 0.254: R1.2 26.35,48.31 C1.1 | C1.1 C3.1 C4.1 26.4,35.68 C9.1 | C9.1 26.28,31.35 25.4,30.48 TP1.TP | C1.1 33.02,48.26 33.31,48.55 U$1.4 | R17.1 C9.1
N$14
  Top 0.254: J1.8 81.28,63.5 82.14,62.64 87.8,62.64 89.23,61.2 89.23,58.4 87.63,56.8 U4.10
N$15  (via drill 0.35)
  Top 0.254: U4.11 86.66,57.44 v87.63,58.42 | v88.9,63.5 85.09,63.5 83.82,64.77 J1.9
  Bottom 0.254: v87.63,58.42 88.9,59.69 v88.9,63.5
N$16
  Top 0.203: U1.6 69.85,17.25
  Top 0.254: 69.85,17.25 73.13,13.97 79.01,13.97 80.28,12.7 C10.1
N$17
  Top 0.254: J1.1 63.5,66.04 65.06,64.47 U3.14
N$18
  Top 0.254: LED2.K 100.33,35.56 R10.2
N$19
  Top 0.203: J8.1 50.8,5.08 54.61,1.27 99.06,1.27
  Top 0.254: 99.06,1.27 102.87,5.08 102.87,22.86 101.6,24.13 J5.6
N$20
  Top 0.254: R9.2 LED1.K
N$21
  Top 0.254: R5.1 2.96,62.23 2.96,67.73 T1.1
N$22
  Top 0.254: T1.3 R12.2
N$23  (via drill 0.35)
  Top 0.203: U1.20 80.54,30.34
  Top 0.254: v93.98,39.37 89.57,39.37 80.54,30.34
  Bottom 0.254: v93.98,39.37 96.52,36.83 96.52,33.02 LED1.A
N$24
  Top 0.203: U1.21 79.4,31.14
  Top 0.254: LED2.A 88.9,40.64 79.4,31.14
N$25  (via drill 0.35)
  Top 0.152: 100.52,48.26 LED3.A
  Top 0.203: U1.30 68.25,36.69 v68.39,36.83 | v77.47,34.29 77.47,32.31 77.49,32.29 77.49,31.94
  Top 0.254: 77.47,31.94 77.49,31.94 78.93,31.94 83.82,36.83 83.82,45.72 86.36,48.26 LED3.A
  Bottom 0.203: v68.39,36.83 69.66,38.1 76.2,38.1 76.2,35.56 v77.47,34.29
  Bottom 0.254: v68.39,36.83 63.31,36.83 60.77,34.29 TP11.TP
N$26
  Top 0.254: R13.2 21.17,68.03 R6.1
N$27
  Top 0.254: U3.13 65.71,65.1 66.04,65.42 J1.2
N$28
  Top 0.254: U3.11 67.02,64.47 68.58,66.04 J1.3
N$29
  Top 0.254: J1.4 71.12,66.04 67.66,62.58 U3.10
N$30  (via drill 0.35)
  Top 0.254: U4.13 86.69,58.75 87.22,59.28 v87.22,60.55
  Bottom 0.254: v87.22,60.55 87.22,67.72 J1.10
N$32
  Top 0.203: U$2.P$1 28.9,21.59 C5.1
  Top 0.254: R18.1 32.17,21.44 C5.1 C6.1
PDI  (via drill 0.35)
  Top 0.203: U1.10 73.05,18.39
  Top 0.254: 73.05,18.39 v73.66,17.78
  Bottom 0.254: v73.66,17.78 86.36,17.78 87.63,19.05 J5.1
PDO  (via drill 0.35)
  Top 0.203: U1.11 73.85,18.86
  Top 0.254: 73.85,18.86 75.39,17.32 80.47,17.32 v81.28,16.51
  Bottom 0.254: v81.28,16.51 99.06,16.51 100.33,17.78 J5.2
RST
  Top 0.203: U1.13 78.13,24.74
  Top 0.254: J5.5 95.48,24.13 93.98,22.63 R16.1 80.24,22.63 78.13,24.74
SCLK
  Top 0.203: U1.9 72.25,17.92 72.39,17.78
  Top 0.254: 72.39,17.78 74.52,15.65 88.2,15.65 94.15,21.59 J5.3
SENSOR_PWR  (via drill 0.35)
  Top 0.203: U1.40 v59.16,27.14
  Top 0.254: R6.2 19.05,63.08 v19.05,45.16
  Bottom 0.254: J3.2 13.97,45.72 14.53,45.16 v19.05,45.16 41.2,45.16 43.18,43.18 43.18,33.02 43.74,32.46 53.34,32.46 53.34,29.21 55.41,27.14 v59.16,27.14
SOIL_SENSOR  (via drill 0.35)
  Top 0.203: U1.41 58.5,26.34 58.42,26.26
  Top 0.254: R5.2 5.93,58 5.08,57.15 TP5.TP J3.1 8.89,48.26 10.16,46.99 v10.16,43.18 | v10.16,19.05 10.16,13.97 15.24,8.89 33.02,8.89 36.83,12.7 36.83,19.05 38.1,20.32 52.48,20.32 58.42,26.26
  Bottom 0.254: v10.16,19.05 v10.16,43.18
SWITCH
  Top 0.254: J2.1 37.83,69.85 C2.1 37.83,61.23 C14.1 | U$1.1 31.75,53.05 31.75,54.61 38.1,54.61 | U$1.8 39.37,53.05 39.37,54.61 38.1,54.61 | L1.1 44.24,60.56 44.15,60.66 43.84,60.96 C14.1 | C14.1 38.1,54.61
TCK
  Top 0.203: U1.39 58.42,27.94
  Top 0.254: J4.1 43.18,21.59 52.07,21.59 58.42,27.94
TDI  (via drill 0.35)
  Top 0.203: U1.36 52.21,30.34 v52.07,30.48
  Bottom 0.254: J4.4 48.26,26.67 v52.07,30.48
TDO
  Top 0.203: U1.37 43.18,29.54
  Top 0.254: 43.18,29.54 J4.3
TMS
  Top 0.203: U1.38 55.41,28.74
  Top 0.254: 55.41,28.74 50.8,24.13 J4.2
VBUS
  Top 0.203: J7.2 95.25,11.43 95.25,12.7 93.98,13.97 79.55,13.97 79.17,14.35 74.55,14.35 70.65,18.25 U1.7
VCC  (via drill 0.35)
  Top 0.152: C18.1 C19.1 C20.1 C21.1 C22.1
  Top 0.203: 62.23,19.55 61.15,19.55 v61.15,24.08 61.29,23.94 U1.44 | U1.14 78.6,25.54 | U1.2 66.65,19.68 v66.78,19.55 | U1.34 v61.15,31.94 | U1.24 73.05,36.22
  Top 0.254: C17.1 C18.1 | 38.2,36.41 U2.1 35.24,36.51 34.29,35.56 R17.2 31.33,33.02 | R16.2 88.9,25.63 87.4,24.13 80.01,24.13 v78.74,25.4 78.6,25.54 | C8.1 7.35,34.34 C15.1 | C15.1 C16.1 | C22.1 11.75,26.35 12.7,25.4 25.4,25.4 31.33,31.33 31.33,33.02 | U2.4 41.91,34.61 41.91,33.02 v39.37,33.02 31.33,33.02 | C21.1 9.21,34.29 C15.1 | J8.2 48.26,19.05 48.76,19.55 61.15,19.55 | v66.78,19.55 62.23,19.55 | 73.05,36.22 74.93,38.1 77.47,38.1 v78.74,36.83 | v61.15,31.94 63.75,34.54 v63.75,53.34 63.75,55.53 U3.1 | U4.1 78.41,61.29 77.47,62.23 v74.93,62.23
  Bottom 0.203: v61.15,31.94 61.15,30.67 | v78.74,36.83 v78.74,25.4
  Bottom 0.254: v39.37,33.02 39.37,15.24 J8.2 | 61.15,30.67 v61.15,24.08 | v66.78,19.55 76.7,19.55 78.74,21.59 v78.74,25.4 | v74.93,62.23 73.66,60.96 73.66,54.61 71.73,52.68 65.77,52.68 65.11,53.34 v63.75,53.34
VFB  (via drill 0.35)
  Top 0.254: R2.2 25.08,55.24 R1.1 v24.45,50.8 | v24.45,50.8 24.4,50.8 | U$1.2 32.08,52.39 30.48,50.8 v27.94,50.8 | v24.45,50.8 24.45,48.31 C1.2
  Bottom 0.254: v27.94,50.8 v24.45,50.8

## Text on the board
tNames: Happy Plant | Group 10 (the best) | Emil, Huanle, Cassandra, Brianne